# EAGLE board power circuit2 (EAGLE 7.3.0)
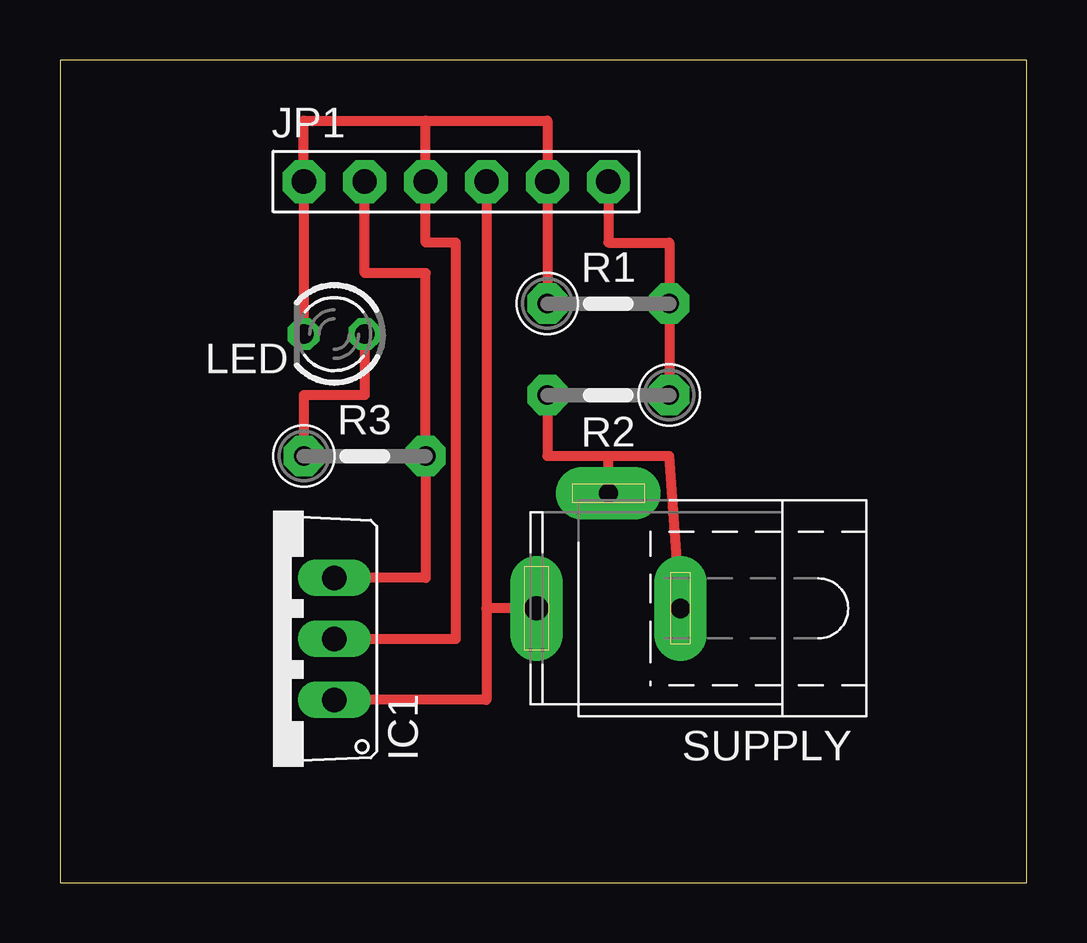
[diagram p0: board, top side]

Size 40.31 x 34.28 mm. Coordinates in mm from the lower left corner, seen from the top.
Outline: 0,0 40.31,0 40.31,34.28 0,34.28 0,0
Copper layers (1*16): Top 0.035mm / dielectric 1.5mm / Bottom 0.035mm
Design rules "default": minimum track width 10mil, minimum drill 24mil, track to track 8mil, track to pad 8mil, pad to pad 8mil, via to via 8mil, smd to smd 8mil, copper to edge 40mil, drill to drill 8mil, minimum pad ring 10mil, minimum via ring 8mil, stop-mask expansion 4mil, vias tented up to drill 0mil, thermal gap 10mil

## Footprints (pad centres in the part's own frame; a part is rotated, then mirrored left to right if it is on the bottom)
TO220V = drill 1.016 long: 1 -2.54,-2.54; 2 0,-2.54; 3 2.54,-2.54
1X06-BIG = drill 1.016 pad 1.778 octagon: 1 -6.35,0; 2 -3.81,0; 3 -1.27,0; 4 1.27,0; 5 3.81,0; 6 6.35,0
LED3MM = drill 0.813 octagon: A -1.27,0; K 1.27,0
0207/5V = drill 0.813 pad 1.676 octagon: 1 -2.54,0; 2 2.54,0
SPC4078 = drill 0.8 pad 2.184 long: 1 -3,0; 2 0,-4.8 | drill 1 pad 2.184 long: 3 3,0

## Placement (x,y rotation side)
IC1  7824TV  [TO220V]  8.89,10.16 90 top
JP1  [1X06-BIG]  16.51,29.21 0 top
LED  TLLR4400  [LED3MM]  11.43,22.86 180 top
R1  1.2K  [0207/5V]  22.86,24.13 0 top
R2  10K  [0207/5V]  22.86,20.32 180 top
R3  1K  [0207/5V]  12.7,17.78 0 top
SUPPLY  [SPC4078]  22.86,11.43 180 top

## Library data of the parts
IC1 = linear
JP1 R1-R3 = adafruit
LED = led; MF: VISHAY SEMICONDUCTOR; OC_FARNELL: 1612437
SUPPLY = con-jack; OC_FARNELL: unknown; OC_NEWARK: unknown

## Nets
24V: IC1.1 JP1.4 SUPPLY.3
A5: JP1.6 R1.2 R2.1
GND: IC1.2 JP1.1 JP1.3 JP1.5 LED.K R1.1
N$1: LED.A R3.1
N$2: IC1.3 JP1.2 R3.2
N$4: R2.2 SUPPLY.1 SUPPLY.2

## Tracks (layer width: path | path; a pad name or v marks a point on that pad's centre or on a via)
24V
  Top 0.406: SUPPLY.3 17.78,11.43 | 17.78,11.43 17.78,7.62 IC1.1 | JP1.4 17.78,11.43
A5
  Top 0.406: JP1.6 22.86,26.67 25.4,26.67 R1.2 R2.1
GND
  Top 0.406: LED.K JP1.1 10.16,31.75 15.24,31.75 | R1.1 JP1.5 20.32,31.75 15.24,31.75 | IC1.2 16.51,10.16 16.51,26.67 15.24,26.67 JP1.3 15.24,31.75
N$1
  Top 0.406: LED.A 12.7,20.32 10.16,20.32 R3.1
N$2
  Top 0.406: IC1.3 15.24,12.7 R3.2 15.24,25.4 12.7,25.4 JP1.2
N$4
  Top 0.406: R2.2 20.32,17.78 22.86,17.78 | SUPPLY.1 25.4,17.78 22.86,17.78 | SUPPLY.2 22.86,17.78